# Altium PCB PCB2.PcbDoc (part 2 of 4)
Units mm, origin at the board's own origin, x right, y up, seen from the top; angles counter-clockwise.
Board outline 94 x 91 mm, 2 copper layers (Top Layer, Bottom Layer); 387 components, 398 nets, 1559 pads, 0 vias.
Unrouted connection lines stored in the file: 857.
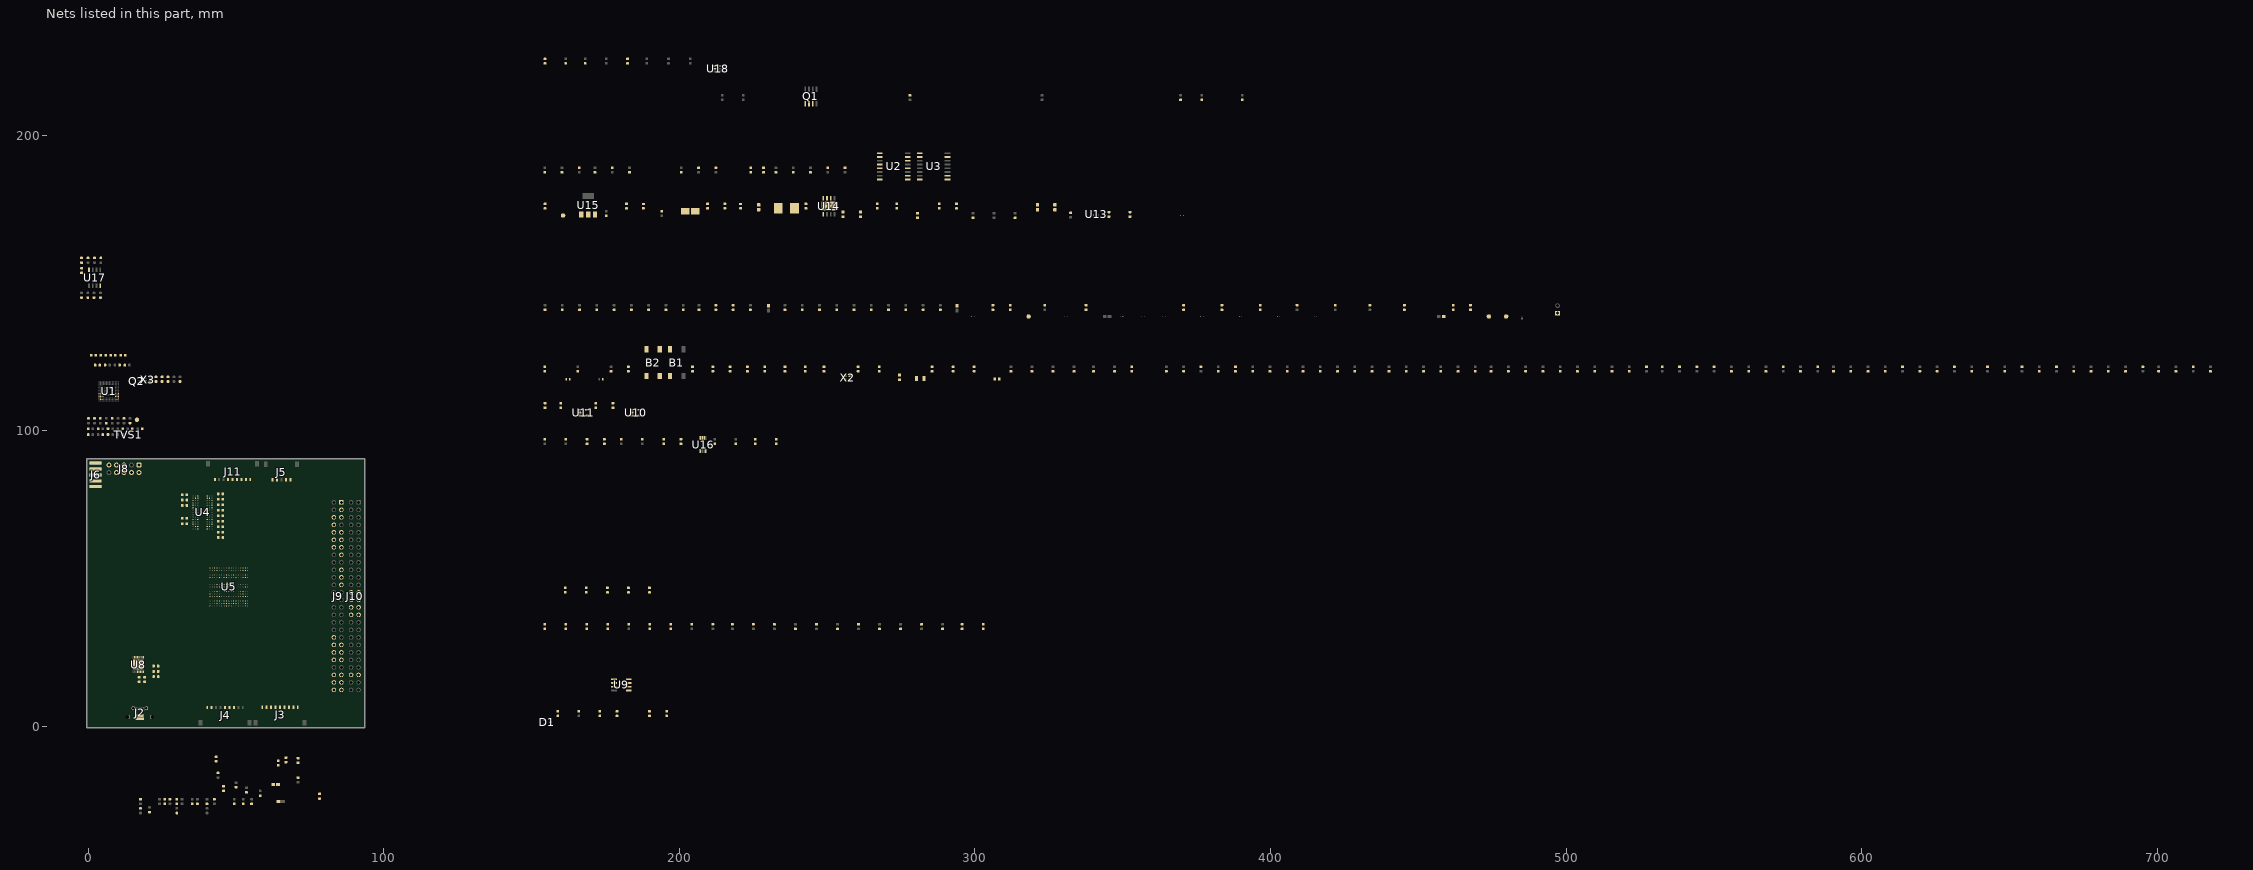
[diagram p2: the nets of this part, all layers, seen from the top]

## Footprints (in the part's own frame and the unit in brackets; to place one, negate y for a bottom-side part, rotate by r counter-clockwise, add the part's x,y. Pads: shape width x height; smd on the part's side, far side on the other; paste and mask are expansions set on the pad) (continued)
IC_TPS25974ARPWR [mm]
  rect 0.1x0.1 smd paste-1 mask+0: 1(-0.725,0.875) 2(-0.9,0.225) 3(-0.9,-0.225) 4(-0.725,-0.875) 5(-0.25,0) 6(0.25,0) 7(0.725,-0.875) 8(0.9,-0.225) 9(0.9,0.225) 10(0.725,0.875)
  Top Layer region: 1.158,-0.101 1.16,-0.101 1.163,-0.102 1.165,-0.102 1.168,-0.103 1.17,-0.104 1.173,-0.105 1.175,-0.107 1.177,-0.108 1.179,-0.11 1.181,-0.111 1.183,-0.113 1.185,-0.115 1.187,-0.117 1.189,-0.119 1.19,-0.121 1.192,-0.123 1.193,-0.125 1.195,-0.127 1.196,-0.13 1.197,-0.132 1.198,-0.135 1.198,-0.137 1.199,-0.14 1.199,-0.142 1.2,-0.145 1.2,-0.147 1.2,-0.15 1.2,-0.3 1.2,-0.303 1.2,-0.305 1.199,-0.308 1.199,-0.31 1.198,-0.313 1.198,-0.315 1.197,-0.318 1.196,-0.32 1.195,-0.323 1.193,-0.325 1.192,-0.327 1.19,-0.329 1.189,-0.331 1.187,-0.333 1.185,-0.335 1.183,-0.337 1.181,-0.339 1.179,-0.34 1.177,-0.342 1.175,-0.343 1.173,-0.345 1.17,-0.346 1.168,-0.347 1.165,-0.348 1.163,-0.348 1.16,-0.349 1.158,-0.349 1.155,-0.35 0.645,-0.35 0.642,-0.349 0.64,-0.349 0.637,-0.348 0.635,-0.348 0.632,-0.347 0.63,-0.346 0.627,-0.345 0.625,-0.343 0.623,-0.342 0.621,-0.34 0.619,-0.339 0.617,-0.337 0.615,-0.335 0.613,-0.333 0.611,-0.331 0.61,-0.329 0.608,-0.327 0.607,-0.325 0.605,-0.323 0.604,-0.32 0.603,-0.318 0.602,-0.315 0.602,-0.313 0.601,-0.31 0.601,-0.308 0.6,-0.305 0.6,-0.303 0.6,-0.3 0.6,-0.15 0.6,-0.147 0.6,-0.145 0.601,-0.142 0.601,-0.14 0.602,-0.137 0.602,-0.135 0.603,-0.132 0.604,-0.13 0.605,-0.127 0.607,-0.125 0.608,-0.123 0.61,-0.121 0.611,-0.119 0.613,-0.117 0.615,-0.115 0.617,-0.113 0.619,-0.111 0.621,-0.11 0.623,-0.108 0.625,-0.107 0.627,-0.105 0.63,-0.104 0.632,-0.103 0.635,-0.102 0.637,-0.102 0.64,-0.101 0.642,-0.101 0.645,-0.1 1.155,-0.1
  Top Layer region: 0.358,1.199 0.36,1.199 0.363,1.198 0.365,1.198 0.368,1.197 0.37,1.196 0.373,1.195 0.375,1.193 0.377,1.192 0.379,1.19 0.381,1.189 0.383,1.187 0.385,1.185 0.387,1.183 0.389,1.181 0.39,1.179 0.392,1.177 0.393,1.175 0.395,1.173 0.396,1.17 0.397,1.168 0.398,1.165 0.398,1.163 0.399,1.16 0.399,1.158 0.4,1.155 0.4,1.153 0.4,1.15 0.4,-1.15 0.4,-1.153 0.4,-1.155 0.399,-1.158 0.399,-1.16 0.398,-1.163 0.398,-1.165 0.397,-1.168 0.396,-1.17 0.395,-1.173 0.393,-1.175 0.392,-1.177 0.39,-1.179 0.389,-1.181 0.387,-1.183 0.385,-1.185 0.383,-1.187 0.381,-1.189 0.379,-1.19 0.377,-1.192 0.375,-1.193 0.373,-1.195 0.37,-1.196 0.368,-1.197 0.365,-1.198 0.363,-1.198 0.36,-1.199 0.358,-1.199 0.355,-1.2 0.145,-1.2 0.142,-1.199 0.14,-1.199 0.137,-1.198 0.135,-1.198 0.132,-1.197 0.13,-1.196 0.127,-1.195 0.125,-1.193 0.123,-1.192 0.121,-1.19 0.119,-1.189 0.117,-1.187 0.115,-1.185 0.113,-1.183 0.111,-1.181 0.11,-1.179 0.108,-1.177 0.107,-1.175 0.105,-1.173 0.104,-1.17 0.103,-1.168 0.102,-1.165 0.102,-1.163 0.101,-1.16 0.101,-1.158 0.1,-1.155 0.1,-1.153 0.1,-1.15 0.1,1.15 0.1,1.153 0.1,1.155 0.101,1.158 0.101,1.16 0.102,1.163 0.102,1.165 0.103,1.168 0.104,1.17 0.105,1.173 0.107,1.175 0.108,1.177 0.11,1.179 0.111,1.181 0.113,1.183 0.115,1.185 0.117,1.187 0.119,1.189 0.121,1.19 0.123,1.192 0.125,1.193 0.127,1.195 0.13,1.196 0.132,1.197 0.135,1.198 0.137,1.198 0.14,1.199 0.142,1.199 0.145,1.2 0.355,1.2
  Top Layer region: -0.142,1.199 -0.14,1.199 -0.137,1.198 -0.135,1.198 -0.132,1.197 -0.13,1.196 -0.127,1.195 -0.125,1.193 -0.123,1.192 -0.121,1.19 -0.119,1.189 -0.117,1.187 -0.115,1.185 -0.113,1.183 -0.111,1.181 -0.11,1.179 -0.108,1.177 -0.107,1.175 -0.105,1.173 -0.104,1.17 -0.103,1.168 -0.102,1.165 -0.102,1.163 -0.101,1.16 -0.101,1.158 -0.1,1.155 -0.1,1.153 -0.1,1.15 -0.1,-1.15 -0.1,-1.153 -0.1,-1.155 -0.101,-1.158 -0.101,-1.16 -0.102,-1.163 -0.102,-1.165 -0.103,-1.168 -0.104,-1.17 -0.105,-1.173 -0.107,-1.175 -0.108,-1.177 -0.11,-1.179 -0.111,-1.181 -0.113,-1.183 -0.115,-1.185 -0.117,-1.187 -0.119,-1.189 -0.121,-1.19 -0.123,-1.192 -0.125,-1.193 -0.127,-1.195 -0.13,-1.196 -0.132,-1.197 -0.135,-1.198 -0.137,-1.198 -0.14,-1.199 -0.142,-1.199 -0.145,-1.2 -0.355,-1.2 -0.358,-1.199 -0.36,-1.199 -0.363,-1.198 -0.365,-1.198 -0.368,-1.197 -0.37,-1.196 -0.373,-1.195 -0.375,-1.193 -0.377,-1.192 -0.379,-1.19 -0.381,-1.189 -0.383,-1.187 -0.385,-1.185 -0.387,-1.183 -0.389,-1.181 -0.39,-1.179 -0.392,-1.177 -0.393,-1.175 -0.395,-1.173 -0.396,-1.17 -0.397,-1.168 -0.398,-1.165 -0.398,-1.163 -0.399,-1.16 -0.399,-1.158 -0.4,-1.155 -0.4,-1.153 -0.4,-1.15 -0.4,1.15 -0.4,1.153 -0.4,1.155 -0.399,1.158 -0.399,1.16 -0.398,1.163 -0.398,1.165 -0.397,1.168 -0.396,1.17 -0.395,1.173 -0.393,1.175 -0.392,1.177 -0.39,1.179 -0.389,1.181 -0.387,1.183 -0.385,1.185 -0.383,1.187 -0.381,1.189 -0.379,1.19 -0.377,1.192 -0.375,1.193 -0.373,1.195 -0.37,1.196 -0.368,1.197 -0.365,1.198 -0.363,1.198 -0.36,1.199 -0.358,1.199 -0.355,1.2 -0.145,1.2
  Top Layer region: -0.642,-0.551 -0.64,-0.551 -0.637,-0.552 -0.635,-0.552 -0.632,-0.553 -0.63,-0.554 -0.627,-0.555 -0.625,-0.557 -0.623,-0.558 -0.621,-0.56 -0.619,-0.561 -0.617,-0.563 -0.615,-0.565 -0.613,-0.567 -0.611,-0.569 -0.61,-0.571 -0.608,-0.573 -0.607,-0.575 -0.605,-0.577 -0.604,-0.58 -0.603,-0.582 -0.602,-0.585 -0.602,-0.587 -0.601,-0.59 -0.601,-0.592 -0.6,-0.595 -0.6,-0.597 -0.6,-0.6 -0.6,-1.15 -0.6,-1.153 -0.6,-1.155 -0.601,-1.158 -0.601,-1.16 -0.602,-1.163 -0.602,-1.165 -0.603,-1.168 -0.604,-1.17 -0.605,-1.173 -0.607,-1.175 -0.608,-1.177 -0.61,-1.179 -0.611,-1.181 -0.613,-1.183 -0.615,-1.185 -0.617,-1.187 -0.619,-1.189 -0.621,-1.19 -0.623,-1.192 -0.625,-1.193 -0.627,-1.195 -0.63,-1.196 -0.632,-1.197 -0.635,-1.198 -0.637,-1.198 -0.64,-1.199 -0.642,-1.199 -0.645,-1.2 -0.805,-1.2 -0.808,-1.199 -0.81,-1.199 -0.813,-1.198 -0.815,-1.198 -0.818,-1.197 -0.82,-1.196 -0.823,-1.195 -0.825,-1.193 -0.827,-1.192 -0.829,-1.19 -0.831,-1.189 -0.833,-1.187 -0.835,-1.185 -0.837,-1.183 -0.839,-1.181 -0.84,-1.179 -0.842,-1.177 -0.843,-1.175 -0.845,-1.173 -0.846,-1.17 -0.847,-1.168 -0.848,-1.165 -0.848,-1.163 -0.849,-1.16 -0.849,-1.158 -0.85,-1.155 -0.85,-1.153 -0.85,-1.15 -0.85,-0.85 -1.155,-0.85 -1.158,-0.849 -1.16,-0.849 -1.163,-0.848 -1.165,-0.848 -1.168,-0.847 -1.17,-0.846 -1.173,-0.845 -1.175,-0.843 -1.177,-0.842 -1.179,-0.84 -1.181,-0.839 -1.183,-0.837 -1.185,-0.835 -1.187,-0.833 -1.189,-0.831 -1.19,-0.829 -1.192,-0.827 -1.193,-0.825 -1.195,-0.823 -1.196,-0.82 -1.197,-0.818 -1.198,-0.815 -1.198,-0.813 -1.199,-0.81 -1.199,-0.808 -1.2,-0.805 -1.2,-0.803 -1.2,-0.8 -1.2,-0.6 -1.2,-0.597 -1.2,-0.595 -1.199,-0.592 -1.199,-0.59 -1.198,-0.587 -1.198,-0.585 -1.197,-0.582 -1.196,-0.58 -1.195,-0.577 -1.193,-0.575 -1.192,-0.573 -1.19,-0.571 -1.189,-0.569 -1.187,-0.567 -1.185,-0.565 -1.183,-0.563 -1.181,-0.561 -1.179,-0.56 -1.177,-0.558 -1.175,-0.557 -1.173,-0.555 -1.17,-0.554 -1.168,-0.553 -1.165,-0.552 -1.163,-0.552 -1.16,-0.551 -1.158,-0.551 -1.155,-0.55 -0.645,-0.55
  Top Layer region: 0.808,1.199 0.81,1.199 0.813,1.198 0.815,1.198 0.818,1.197 0.82,1.196 0.823,1.195 0.825,1.193 0.827,1.192 0.829,1.19 0.831,1.189 0.833,1.187 0.835,1.185 0.837,1.183 0.839,1.181 0.84,1.179 0.842,1.177 0.843,1.175 0.845,1.173 0.846,1.17 0.847,1.168 0.848,1.165 0.848,1.163 0.849,1.16 0.849,1.158 0.85,1.155 0.85,1.153 0.85,1.15 0.85,0.85 1.155,0.85 1.158,0.849 1.16,0.849 1.163,0.848 1.165,0.848 1.168,0.847 1.17,0.846 1.173,0.845 1.175,0.843 1.177,0.842 1.179,0.84 1.181,0.839 1.183,0.837 1.185,0.835 1.187,0.833 1.189,0.831 1.19,0.829 1.192,0.827 1.193,0.825 1.195,0.823 1.196,0.82 1.197,0.818 1.198,0.815 1.198,0.813 1.199,0.81 1.199,0.808 1.2,0.805 1.2,0.803 1.2,0.8 1.2,0.6 1.2,0.597 1.2,0.595 1.199,0.592 1.199,0.59 1.198,0.587 1.198,0.585 1.197,0.582 1.196,0.58 1.195,0.577 1.193,0.575 1.192,0.573 1.19,0.571 1.189,0.569 1.187,0.567 1.185,0.565 1.183,0.563 1.181,0.561 1.179,0.56 1.177,0.558 1.175,0.557 1.173,0.555 1.17,0.554 1.168,0.553 1.165,0.552 1.163,0.552 1.16,0.551 1.158,0.551 1.155,0.55 0.645,0.55 0.642,0.551 0.64,0.551 0.637,0.552 0.635,0.552 0.632,0.553 0.63,0.554 0.627,0.555 0.625,0.557 0.623,0.558 0.621,0.56 0.619,0.561 0.617,0.563 0.615,0.565 0.613,0.567 0.611,0.569 0.61,0.571 0.608,0.573 0.607,0.575 0.605,0.577 0.604,0.58 0.603,0.582 0.602,0.585 0.602,0.587 0.601,0.59 0.601,0.592 0.6,0.595 0.6,0.597 0.6,0.6 0.6,1.15 0.6,1.153 0.6,1.155 0.601,1.158 0.601,1.16 0.602,1.163 0.602,1.165 0.603,1.168 0.604,1.17 0.605,1.173 0.607,1.175 0.608,1.177 0.61,1.179 0.611,1.181 0.613,1.183 0.615,1.185 0.617,1.187 0.619,1.189 0.621,1.19 0.623,1.192 0.625,1.193 0.627,1.195 0.63,1.196 0.632,1.197 0.635,1.198 0.637,1.198 0.64,1.199 0.642,1.199 0.645,1.2 0.805,1.2
  Top Layer region: 1.158,-0.551 1.16,-0.551 1.163,-0.552 1.165,-0.552 1.168,-0.553 1.17,-0.554 1.173,-0.555 1.175,-0.557 1.177,-0.558 1.179,-0.56 1.181,-0.561 1.183,-0.563 1.185,-0.565 1.187,-0.567 1.189,-0.569 1.19,-0.571 1.192,-0.573 1.193,-0.575 1.195,-0.577 1.196,-0.58 1.197,-0.582 1.198,-0.585 1.198,-0.587 1.199,-0.59 1.199,-0.592 1.2,-0.595 1.2,-0.597 1.2,-0.6 1.2,-0.8 1.2,-0.803 1.2,-0.805 1.199,-0.808 1.199,-0.81 1.198,-0.813 1.198,-0.815 1.197,-0.818 1.196,-0.82 1.195,-0.823 1.193,-0.825 1.192,-0.827 1.19,-0.829 1.189,-0.831 1.187,-0.833 1.185,-0.835 1.183,-0.837 1.181,-0.839 1.179,-0.84 1.177,-0.842 1.175,-0.843 1.173,-0.845 1.17,-0.846 1.168,-0.847 1.165,-0.848 1.163,-0.848 1.16,-0.849 1.158,-0.849 1.155,-0.85 0.85,-0.85 0.85,-1.15 0.85,-1.153 0.85,-1.155 0.849,-1.158 0.849,-1.16 0.848,-1.163 0.848,-1.165 0.847,-1.168 0.846,-1.17 0.845,-1.173 0.843,-1.175 0.842,-1.177 0.84,-1.179 0.839,-1.181 0.837,-1.183 0.835,-1.185 0.833,-1.187 0.831,-1.189 0.829,-1.19 0.827,-1.192 0.825,-1.193 0.823,-1.195 0.82,-1.196 0.818,-1.197 0.815,-1.198 0.813,-1.198 0.81,-1.199 0.808,-1.199 0.805,-1.2 0.645,-1.2 0.642,-1.199 0.64,-1.199 0.637,-1.198 0.635,-1.198 0.632,-1.197 0.63,-1.196 0.627,-1.195 0.625,-1.193 0.623,-1.192 0.621,-1.19 0.619,-1.189 0.617,-1.187 0.615,-1.185 0.613,-1.183 0.611,-1.181 0.61,-1.179 0.608,-1.177 0.607,-1.175 0.605,-1.173 0.604,-1.17 0.603,-1.168 0.602,-1.165 0.602,-1.163 0.601,-1.16 0.601,-1.158 0.6,-1.155 0.6,-1.153 0.6,-1.15 0.6,-0.6 0.6,-0.597 0.6,-0.595 0.601,-0.592 0.601,-0.59 0.602,-0.587 0.602,-0.585 0.603,-0.582 0.604,-0.58 0.605,-0.577 0.607,-0.575 0.608,-0.573 0.61,-0.571 0.611,-0.569 0.613,-0.567 0.615,-0.565 0.617,-0.563 0.619,-0.561 0.621,-0.56 0.623,-0.558 0.625,-0.557 0.627,-0.555 0.63,-0.554 0.632,-0.553 0.635,-0.552 0.637,-0.552 0.64,-0.551 0.642,-0.551 0.645,-0.55 1.155,-0.55
  Top Layer region: -0.642,1.199 -0.64,1.199 -0.637,1.198 -0.635,1.198 -0.632,1.197 -0.63,1.196 -0.627,1.195 -0.625,1.193 -0.623,1.192 -0.621,1.19 -0.619,1.189 -0.617,1.187 -0.615,1.185 -0.613,1.183 -0.611,1.181 -0.61,1.179 -0.608,1.177 -0.607,1.175 -0.605,1.173 -0.604,1.17 -0.603,1.168 -0.602,1.165 -0.602,1.163 -0.601,1.16 -0.601,1.158 -0.6,1.155 -0.6,1.153 -0.6,1.15 -0.6,0.6 -0.6,0.597 -0.6,0.595 -0.601,0.592 -0.601,0.59 -0.602,0.587 -0.602,0.585 -0.603,0.582 -0.604,0.58 -0.605,0.577 -0.607,0.575 -0.608,0.573 -0.61,0.571 -0.611,0.569 -0.613,0.567 -0.615,0.565 -0.617,0.563 -0.619,0.561 -0.621,0.56 -0.623,0.558 -0.625,0.557 -0.627,0.555 -0.63,0.554 -0.632,0.553 -0.635,0.552 -0.637,0.552 -0.64,0.551 -0.642,0.551 -0.645,0.55 -1.155,0.55 -1.158,0.551 -1.16,0.551 -1.163,0.552 -1.165,0.552 -1.168,0.553 -1.17,0.554 -1.173,0.555 -1.175,0.557 -1.177,0.558 -1.179,0.56 -1.181,0.561 -1.183,0.563 -1.185,0.565 -1.187,0.567 -1.189,0.569 -1.19,0.571 -1.192,0.573 -1.193,0.575 -1.195,0.577 -1.196,0.58 -1.197,0.582 -1.198,0.585 -1.198,0.587 -1.199,0.59 -1.199,0.592 -1.2,0.595 -1.2,0.597 -1.2,0.6 -1.2,0.8 -1.2,0.803 -1.2,0.805 -1.199,0.808 -1.199,0.81 -1.198,0.813 -1.198,0.815 -1.197,0.818 -1.196,0.82 -1.195,0.823 -1.193,0.825 -1.192,0.827 -1.19,0.829 -1.189,0.831 -1.187,0.833 -1.185,0.835 -1.183,0.837 -1.181,0.839 -1.179,0.84 -1.177,0.842 -1.175,0.843 -1.173,0.845 -1.17,0.846 -1.168,0.847 -1.165,0.848 -1.163,0.848 -1.16,0.849 -1.158,0.849 -1.155,0.85 -0.85,0.85 -0.85,1.15 -0.85,1.153 -0.85,1.155 -0.849,1.158 -0.849,1.16 -0.848,1.163 -0.848,1.165 -0.847,1.168 -0.846,1.17 -0.845,1.173 -0.843,1.175 -0.842,1.177 -0.84,1.179 -0.839,1.181 -0.837,1.183 -0.835,1.185 -0.833,1.187 -0.831,1.189 -0.829,1.19 -0.827,1.192 -0.825,1.193 -0.823,1.195 -0.82,1.196 -0.818,1.197 -0.815,1.198 -0.813,1.198 -0.81,1.199 -0.808,1.199 -0.805,1.2 -0.645,1.2
  Top Layer region: 1.158,0.349 1.16,0.349 1.163,0.348 1.165,0.348 1.168,0.347 1.17,0.346 1.173,0.345 1.175,0.343 1.177,0.342 1.179,0.34 1.181,0.339 1.183,0.337 1.185,0.335 1.187,0.333 1.189,0.331 1.19,0.329 1.192,0.327 1.193,0.325 1.195,0.323 1.196,0.32 1.197,0.318 1.198,0.315 1.198,0.313 1.199,0.31 1.199,0.308 1.2,0.305 1.2,0.303 1.2,0.3 1.2,0.15 1.2,0.147 1.2,0.145 1.199,0.142 1.199,0.14 1.198,0.137 1.198,0.135 1.197,0.132 1.196,0.13 1.195,0.127 1.193,0.125 1.192,0.123 1.19,0.121 1.189,0.119 1.187,0.117 1.185,0.115 1.183,0.113 1.181,0.111 1.179,0.11 1.177,0.108 1.175,0.107 1.173,0.105 1.17,0.104 1.168,0.103 1.165,0.102 1.163,0.102 1.16,0.101 1.158,0.101 1.155,0.1 0.645,0.1 0.642,0.101 0.64,0.101 0.637,0.102 0.635,0.102 0.632,0.103 0.63,0.104 0.627,0.105 0.625,0.107 0.623,0.108 0.621,0.11 0.619,0.111 0.617,0.113 0.615,0.115 0.613,0.117 0.611,0.119 0.61,0.121 0.608,0.123 0.607,0.125 0.605,0.127 0.604,0.13 0.603,0.132 0.602,0.135 0.602,0.137 0.601,0.14 0.601,0.142 0.6,0.145 0.6,0.147 0.6,0.15 0.6,0.3 0.6,0.303 0.6,0.305 0.601,0.308 0.601,0.31 0.602,0.313 0.602,0.315 0.603,0.318 0.604,0.32 0.605,0.323 0.607,0.325 0.608,0.327 0.61,0.329 0.611,0.331 0.613,0.333 0.615,0.335 0.617,0.337 0.619,0.339 0.621,0.34 0.623,0.342 0.625,0.343 0.627,0.345 0.63,0.346 0.632,0.347 0.635,0.348 0.637,0.348 0.64,0.349 0.642,0.349 0.645,0.35 1.155,0.35
  Top Layer region: -0.642,-0.101 -0.64,-0.101 -0.637,-0.102 -0.635,-0.102 -0.632,-0.103 -0.63,-0.104 -0.627,-0.105 -0.625,-0.107 -0.623,-0.108 -0.621,-0.11 -0.619,-0.111 -0.617,-0.113 -0.615,-0.115 -0.613,-0.117 -0.611,-0.119 -0.61,-0.121 -0.608,-0.123 -0.607,-0.125 -0.605,-0.127 -0.604,-0.13 -0.603,-0.132 -0.602,-0.135 -0.602,-0.137 -0.601,-0.14 -0.601,-0.142 -0.6,-0.145 -0.6,-0.147 -0.6,-0.15 -0.6,-0.3 -0.6,-0.303 -0.6,-0.305 -0.601,-0.308 -0.601,-0.31 -0.602,-0.313 -0.602,-0.315 -0.603,-0.318 -0.604,-0.32 -0.605,-0.323 -0.607,-0.325 -0.608,-0.327 -0.61,-0.329 -0.611,-0.331 -0.613,-0.333 -0.615,-0.335 -0.617,-0.337 -0.619,-0.339 -0.621,-0.34 -0.623,-0.342 -0.625,-0.343 -0.627,-0.345 -0.63,-0.346 -0.632,-0.347 -0.635,-0.348 -0.637,-0.348 -0.64,-0.349 -0.642,-0.349 -0.645,-0.35 -1.155,-0.35 -1.158,-0.349 -1.16,-0.349 -1.163,-0.348 -1.165,-0.348 -1.168,-0.347 -1.17,-0.346 -1.173,-0.345 -1.175,-0.343 -1.177,-0.342 -1.179,-0.34 -1.181,-0.339 -1.183,-0.337 -1.185,-0.335 -1.187,-0.333 -1.189,-0.331 -1.19,-0.329 -1.192,-0.327 -1.193,-0.325 -1.195,-0.323 -1.196,-0.32 -1.197,-0.318 -1.198,-0.315 -1.198,-0.313 -1.199,-0.31 -1.199,-0.308 -1.2,-0.305 -1.2,-0.303 -1.2,-0.3 -1.2,-0.15 -1.2,-0.147 -1.2,-0.145 -1.199,-0.142 -1.199,-0.14 -1.198,-0.137 -1.198,-0.135 -1.197,-0.132 -1.196,-0.13 -1.195,-0.127 -1.193,-0.125 -1.192,-0.123 -1.19,-0.121 -1.189,-0.119 -1.187,-0.117 -1.185,-0.115 -1.183,-0.113 -1.181,-0.111 -1.179,-0.11 -1.177,-0.108 -1.175,-0.107 -1.173,-0.105 -1.17,-0.104 -1.168,-0.103 -1.165,-0.102 -1.163,-0.102 -1.16,-0.101 -1.158,-0.101 -1.155,-0.1 -0.645,-0.1
  Top Layer region: -0.642,0.349 -0.64,0.349 -0.637,0.348 -0.635,0.348 -0.632,0.347 -0.63,0.346 -0.627,0.345 -0.625,0.343 -0.623,0.342 -0.621,0.34 -0.619,0.339 -0.617,0.337 -0.615,0.335 -0.613,0.333 -0.611,0.331 -0.61,0.329 -0.608,0.327 -0.607,0.325 -0.605,0.323 -0.604,0.32 -0.603,0.318 -0.602,0.315 -0.602,0.313 -0.601,0.31 -0.601,0.308 -0.6,0.305 -0.6,0.303 -0.6,0.3 -0.6,0.15 -0.6,0.147 -0.6,0.145 -0.601,0.142 -0.601,0.14 -0.602,0.137 -0.602,0.135 -0.603,0.132 -0.604,0.13 -0.605,0.127 -0.607,0.125 -0.608,0.123 -0.61,0.121 -0.611,0.119 -0.613,0.117 -0.615,0.115 -0.617,0.113 -0.619,0.111 -0.621,0.11 -0.623,0.108 -0.625,0.107 -0.627,0.105 -0.63,0.104 -0.632,0.103 -0.635,0.102 -0.637,0.102 -0.64,0.101 -0.642,0.101 -0.645,0.1 -1.155,0.1 -1.158,0.101 -1.16,0.101 -1.163,0.102 -1.165,0.102 -1.168,0.103 -1.17,0.104 -1.173,0.105 -1.175,0.107 -1.177,0.108 -1.179,0.11 -1.181,0.111 -1.183,0.113 -1.185,0.115 -1.187,0.117 -1.189,0.119 -1.19,0.121 -1.192,0.123 -1.193,0.125 -1.195,0.127 -1.196,0.13 -1.197,0.132 -1.198,0.135 -1.198,0.137 -1.199,0.14 -1.199,0.142 -1.2,0.145 -1.2,0.147 -1.2,0.15 -1.2,0.3 -1.2,0.303 -1.2,0.305 -1.199,0.308 -1.199,0.31 -1.198,0.313 -1.198,0.315 -1.197,0.318 -1.196,0.32 -1.195,0.323 -1.193,0.325 -1.192,0.327 -1.19,0.329 -1.189,0.331 -1.187,0.333 -1.185,0.335 -1.183,0.337 -1.181,0.339 -1.179,0.34 -1.177,0.342 -1.175,0.343 -1.173,0.345 -1.17,0.346 -1.168,0.347 -1.165,0.348 -1.163,0.348 -1.16,0.349 -1.158,0.349 -1.155,0.35 -0.645,0.35
  silkscreen extent -2,-1.3 1.3,1.3, body extent -1,-1 1,1, height 1
JCET-SMB-2_M [mm] "Molded Diode, 2-Leads, Body 4.57x3.94mm"
  rect 2.85x2.25 smd: 1(-1.675,0) 2(1.675,0)
  silkscreen extent -2.3,-2 3.6,2, body extent -2.5,-1.97 2.5,1.97, height 2.44
Jump2 [mil]
  round 1 smd: 1(0,17.33) 2(0,-17.33)
  Top Layer region: 29.08,-5.13 23.68,-17.63 13.25,-26.39 0,-29.53 -13.25,-26.39 -23.68,-17.63 -29.08,-5.13 -29.08,-5.13
  Top Layer region: -29.08,5.13 -23.68,17.63 -13.25,26.39 0,29.53 13.25,26.39 23.68,17.63 29.08,5.13 29.08,5.13
  silkscreen extent -39,-39 39,39
LED-0603-GREEN [mm]
  rect 0.9x1 smd: 1(-0.8,0) 2(0.8,0)
  silkscreen extent -1.27,-0.58 1.27,0.58, body extent -0.81,-0.5 0.81,0.5, height 0.98
LED-0603-RED [mm]
  rect 0.9x1 smd: 1(-0.8,0) 2(0.8,0)
  silkscreen extent -1.27,-0.58 1.27,0.58, body extent -0.81,-0.5 0.81,0.5, height 0.98
MODULE_FPGA [mm]
  Keep-Out Layer region: -8.382,-8.382 -8.382,8.382 25.4,8.382 25.4,-8.382
  silkscreen extent -8.38,-8.38 25.4,8.38
NZ2520SH-24M [mm]
  rect 0.95x0.85 smd: 1(-0.815,0.625) 2(-0.815,-0.625) 3(0.835,-0.625) 4(0.835,0.625)
  silkscreen extent -1.35,1.4 -1.25,1.5, body extent -1.3,-1.05 1.3,1.05, height 0.9
ONSC-SOT-23-3-318-08_V [mm] "SOT23, 3-Leads, Body 2.92x1.3mm, Pitch 0.95mm"
  rect 0.9x0.8 smd: 1(-1,0.95) 2(-1,-0.95) 3(1,0)
  silkscreen extent -1.12,-1.46 0.65,2.02, body extent -0.65,-1.46 0.65,1.46, height 1.11
QFN32_5X5MC_MCH [mil]
  rect 32x10 smd paste+0 mask+0: 1(-96.5,70) 2(-96.5,50) 3(-96.5,30) 4(-96.5,10) 5(-96.5,-10) 6(-96.5,-30) 7(-96.5,-50) 8(-96.5,-70) 17(96.5,-70) 18(96.5,-50) 19(96.5,-30) 20(96.5,-10) 21(96.5,10) 22(96.5,30) 23(96.5,50) 24(96.5,70)
  rect 10x32 smd paste+0 mask+0: 9(-70,-96.5) 10(-50,-96.5) 11(-30,-96.5) 12(-10,-96.5) 13(10,-96.5) 14(30,-96.5) 15(50,-96.5) 16(70,-96.5) 25(70,96.5) 26(50,96.5) 27(30,96.5) 28(10,96.5) 29(-10,96.5) 30(-30,96.5) 31(-50,96.5) 32(-70,96.5)
  rect 134x134 smd paste-66.5 mask-66.5: 33(0,0)
  silkscreen extent -103,-132 132,132, body extent -101,-101 101,101, height 65
RES_C_1608X60 [mm] "Chip Resistor, 2-Leads, Body 1.63x0.83mm, IPC High Density"
  rrect50% 0.85x0.95 smd: 1(-0.775,0) 2(0.775,0)
  silkscreen extent -0.9,-0.7 0.9,0.7, body extent -0.87,-0.48 0.87,0.48, height 0.6
SOIC8_150MIL_N_ISI [mil]
  rect 57.5x22 smd paste+0 mask+0: 1(-107.25,75) 2(-107.25,25) 3(-107.25,-25) 4(-107.25,-75) 5(107.25,-75) 6(107.25,-25) 7(107.25,25) 8(107.25,75)
  silkscreen extent -84,-104 84,104, body extent -122,-99 122,99, height 69
"SOIC127P599X175-8N - duplicate" [mm]
  rrect25% 1.97x0.6 smd: 1(-2.47,1.905) 2(-2.47,0.635) 3(-2.47,-0.635) 4(-2.47,-1.905) 5(2.47,-1.905) 6(2.47,-0.635) 7(2.47,0.635) 8(2.47,1.905)
  silkscreen extent -4.14,-2.52 1.95,2.52, body extent -3,-2.45 3,2.45, height 1.75
SOIC127P600X175-8N [mm]
  rrect25% 1.97x0.6 smd: 1(-2.475,1.905) 2(-2.475,0.635) 3(-2.475,-0.635) 4(-2.475,-1.905) 5(2.475,-1.905) 6(2.475,-0.635) 7(2.475,0.635) 8(2.475,1.905)
  silkscreen extent -4.54,-2.52 1.95,2.52, body extent -3,-2.45 3,2.45, height 1.75
SOP2-16_7P5X10P3_MRN [mil]
  rect 76x22 smd paste+0 mask+0: 1(-185.5,175) 2(-185.5,125) 3(-185.5,75) 4(-185.5,25) 5(-185.5,-25) 6(-185.5,-75) 7(-185.5,-125) 8(-185.5,-175) 9(185.5,-175) 10(185.5,-125) 11(185.5,-75) 12(185.5,-25) 13(185.5,25) 14(185.5,75) 15(185.5,125) 16(185.5,175)
  silkscreen extent -152,-208 244,208, body extent -209,-203 209,203, height 108
SOT230P700X180-4N [mm]
  rect 1.5x2 smd: 1(-2.3,-3.15) 2(0,-3.15) 3(2.3,-3.15)
  rect 3.8x2 smd: 4(0,3.15)
  silkscreen extent -3.6,-3.7 3.35,1.85, body extent -3.25,-3.5 3.25,3.5, height 1.8
SRP7050TA-220M [mm]
  rect 2.95x3.5 smd: 1(-2.725,0) 2(2.725,0)
  silkscreen extent -4.4,-3.3 4.4,3.3, body extent -3.65,-3.3 3.65,3.3, height 4.6
TESTPOINT [mm]
  round 1.5 smd: 1(0,0)
  silkscreen extent -1,-1 1,1
TFBGA240+25 [mil]
  round 9 smd paste+0 mask+3: A1(-251.97,251.97) A2(-220.47,251.97) A3(-188.98,251.97) A4(-157.48,251.97) A5(-125.98,251.97) A6(-94.49,251.97) A7(-62.99,251.97) A8(-31.5,251.97) A9(0,251.97) A10(31.5,251.97) A11(62.99,251.97) A12(94.49,251.97) A13(125.98,251.97) A14(157.48,251.97) A15(188.98,251.97) A16(220.47,251.97) A17(251.97,251.97) B1(-251.97,220.47) B2(-220.47,220.47) B3(-188.98,220.47) B4(-157.48,220.47) B5(-125.98,220.47) B6(-94.49,220.47) B7(-62.99,220.47) B8(-31.5,220.47) B9(0,220.47) B10(31.5,220.47) B11(62.99,220.47) B12(94.49,220.47) B13(125.98,220.47) B14(157.48,220.47) B15(188.98,220.47) B16(220.47,220.47) B17(251.97,220.47) C1(-251.97,188.98) C2(-220.47,188.98) C3(-188.98,188.98) C4(-157.48,188.98) C5(-125.98,188.98) C6(-94.49,188.98) C7(-62.99,188.98) C8(-31.5,188.98) C9(0,188.98) C10(31.5,188.98) C11(62.99,188.98) C12(94.49,188.98) C13(125.98,188.98) C14(157.48,188.98) C15(188.98,188.98) C16(220.47,188.98) C17(251.97,188.98) D1(-251.97,157.48) D2(-220.47,157.48) D3(-188.98,157.48) D4(-157.48,157.48) D5(-125.98,157.48) D6(-94.49,157.48) D7(-62.99,157.48) D8(-31.5,157.48) D9(0,157.48) D10(31.5,157.48) D11(62.99,157.48) D12(94.49,157.48) D13(125.98,157.48) D14(157.48,157.48) D15(188.98,157.48) D16(220.47,157.48) D17(251.97,157.48) E1(-251.97,125.98) E2(-220.47,125.98) E3(-188.98,125.98) E4(-157.48,125.98) E5(-125.98,125.98) E6(-94.49,125.98) E7(-62.99,125.98) E8(-31.5,125.98) E9(0,125.98) E10(31.5,125.98) E11(62.99,125.98) E12(94.49,125.98) E13(125.98,125.98) E14(157.48,125.98) E15(188.98,125.98) E16(220.47,125.98) E17(251.97,125.98) F1(-251.97,94.49) F2(-220.47,94.49) F3(-188.98,94.49) F4(-157.48,94.49) F5(-125.98,94.49) F13(125.98,94.49) F14(157.48,94.49) F15(188.98,94.49) F16(220.47,94.49) F17(251.97,94.49) G1(-251.97,62.99) G2(-220.47,62.99) G3(-188.98,62.99) G4(-157.48,62.99) G5(-125.98,62.99) G7(-62.99,62.99) G8(-31.5,62.99) G9(0,62.99) G10(31.5,62.99) G11(62.99,62.99) G13(125.98,62.99) G14(157.48,62.99) G15(188.98,62.99) G16(220.47,62.99) G17(251.97,62.99) H1(-251.97,31.5) H2(-220.47,31.5) H3(-188.98,31.5) H4(-157.48,31.5) H5(-125.98,31.5) H7(-62.99,31.5) H8(-31.5,31.5) H9(0,31.5) H10(31.5,31.5) H11(62.99,31.5) H13(125.98,31.5) H14(157.48,31.5) H15(188.98,31.5) H16(220.47,31.5) H17(251.97,31.5) J1(-251.97,0) J2(-220.47,0) J3(-188.98,0) J4(-157.48,0) J5(-125.98,0) J7(-62.99,0) J8(-31.5,0) J9(0,0) J10(31.5,0) J11(62.99,0) J13(125.98,0) J14(157.48,0) J15(188.98,0) J16(220.47,0) J17(251.97,0) K1(-251.97,-31.5) K2(-220.47,-31.5) K3(-188.98,-31.5) K4(-157.48,-31.5) K5(-125.98,-31.5) K7(-62.99,-31.5) K8(-31.5,-31.5) K9(0,-31.5) K10(31.5,-31.5) K11(62.99,-31.5) K13(125.98,-31.5) K14(157.48,-31.5) K15(188.98,-31.5) K16(220.47,-31.5) K17(251.97,-31.5) L1(-251.97,-62.99) L2(-220.47,-62.99) L3(-188.98,-62.99) L4(-157.48,-62.99) L5(-125.98,-62.99) L7(-62.99,-62.99) L8(-31.5,-62.99) L9(0,-62.99) L10(31.5,-62.99) L11(62.99,-62.99) L13(125.98,-62.99) L14(157.48,-62.99) L15(188.98,-62.99) L16(220.47,-62.99) L17(251.97,-62.99) M1(-251.97,-94.49) M2(-220.47,-94.49) M3(-188.98,-94.49) M4(-157.48,-94.49) M5(-125.98,-94.49) M13(125.98,-94.49) M14(157.48,-94.49) M15(188.98,-94.49) M16(220.47,-94.49) M17(251.97,-94.49) N1(-251.97,-125.98) N2(-220.47,-125.98) N3(-188.98,-125.98) N4(-157.48,-125.98) N5(-125.98,-125.98) N6(-94.49,-125.98) N7(-62.99,-125.98) N8(-31.5,-125.98) N9(0,-125.98) N10(31.5,-125.98) N11(62.99,-125.98) N12(94.49,-125.98) N13(125.98,-125.98) N14(157.48,-125.98) N15(188.98,-125.98) N16(220.47,-125.98) N17(251.97,-125.98) P1(-251.97,-157.48) P2(-220.47,-157.48) P3(-188.98,-157.48) P4(-157.48,-157.48) P5(-125.98,-157.48) P6(-94.49,-157.48) P7(-62.99,-157.48) P8(-31.5,-157.48) P9(0,-157.48) P10(31.5,-157.48) P11(62.99,-157.48) P12(94.49,-157.48) P13(125.98,-157.48) P14(157.48,-157.48) P15(188.98,-157.48) P16(220.47,-157.48) P17(251.97,-157.48) R1(-251.97,-188.98) R2(-220.47,-188.98) R3(-188.98,-188.98) R4(-157.48,-188.98) R5(-125.98,-188.98) R6(-94.49,-188.98) R7(-62.99,-188.98) R8(-31.5,-188.98) R9(0,-188.98) R10(31.5,-188.98) R11(62.99,-188.98) R12(94.49,-188.98) R13(125.98,-188.98) R14(157.48,-188.98) R15(188.98,-188.98) R16(220.47,-188.98) R17(251.97,-188.98) T1(-251.97,-220.47) T2(-220.47,-220.47) T3(-188.98,-220.47) T4(-157.48,-220.47) T5(-125.98,-220.47) T6(-94.49,-220.47) T7(-62.99,-220.47) T8(-31.5,-220.47) T9(0,-220.47) T10(31.5,-220.47) T11(62.99,-220.47) T12(94.49,-220.47) T13(125.98,-220.47) T14(157.48,-220.47) T15(188.98,-220.47) T16(220.47,-220.47) T17(251.97,-220.47) U1(-251.97,-251.97) U2(-220.47,-251.97) U3(-188.98,-251.97) U4(-157.48,-251.97) U5(-125.98,-251.97) U6(-94.49,-251.97) U7(-62.99,-251.97) U8(-31.5,-251.97) U9(0,-251.97) U10(31.5,-251.97) U11(62.99,-251.97) U12(94.49,-251.97) U13(125.98,-251.97) U14(157.48,-251.97) U15(188.98,-251.97) U16(220.47,-251.97) U17(251.97,-251.97)
  Keep-Out Layer region: -285.22,-285.22 -285.22,285.22 285.22,285.22 285.22,-285.22
  silkscreen extent -288,-288 288,288, body extent -279,-279 279,279, height 43
TFBGA-90_8X13_ISI [mil]
  round 16 smd paste+0 mask+0: A1(-125.98,220.47) A2(-94.49,220.47) A3(-62.99,220.47) A7(62.99,220.47) A8(94.49,220.47) A9(125.98,220.47) B1(-125.98,188.98) B2(-94.49,188.98) B3(-62.99,188.98) B7(62.99,188.98) B8(94.49,188.98) B9(125.98,188.98) C1(-125.98,157.48) C2(-94.49,157.48) C3(-62.99,157.48) C7(62.99,157.48) C8(94.49,157.48) C9(125.98,157.48) D1(-125.98,125.98) D2(-94.49,125.98) D3(-62.99,125.98) D7(62.99,125.98) D8(94.49,125.98) D9(125.98,125.98) E1(-125.98,94.49) E2(-94.49,94.49) E3(-62.99,94.49) E7(62.99,94.49) E8(94.49,94.49) E9(125.98,94.49) F1(-125.98,62.99) F2(-94.49,62.99) F3(-62.99,62.99) F7(62.99,62.99) F8(94.49,62.99) F9(125.98,62.99) G1(-125.98,31.5) G2(-94.49,31.5) G3(-62.99,31.5) G7(62.99,31.5) G8(94.49,31.5) G9(125.98,31.5) H1(-125.98,0) H2(-94.49,0) H3(-62.99,0) H7(62.99,0) H8(94.49,0) H9(125.98,0) J1(-125.98,-31.5) J2(-94.49,-31.5) J3(-62.99,-31.5) J7(62.99,-31.5) J8(94.49,-31.5) J9(125.98,-31.5) K1(-125.98,-62.99) K2(-94.49,-62.99) K3(-62.99,-62.99) K7(62.99,-62.99) K8(94.49,-62.99) K9(125.98,-62.99) L1(-125.98,-94.49) L2(-94.49,-94.49) L3(-62.99,-94.49) L7(62.99,-94.49) L8(94.49,-94.49) L9(125.98,-94.49) M1(-125.98,-125.98) M2(-94.49,-125.98) M3(-62.99,-125.98) M7(62.99,-125.98) M8(94.49,-125.98) M9(125.98,-125.98) N1(-125.98,-157.48) N2(-94.49,-157.48) N3(-62.99,-157.48) N7(62.99,-157.48) N8(94.49,-157.48) N9(125.98,-157.48) P1(-125.98,-188.98) P2(-94.49,-188.98) P3(-62.99,-188.98) P7(62.99,-188.98) P8(94.49,-188.98) P9(125.98,-188.98) R1(-125.98,-220.47) R2(-94.49,-220.47) R3(-62.99,-220.47) R7(62.99,-220.47) R8(94.49,-220.47) R9(125.98,-220.47)
  Keep-Out Layer region: -159.23,-253.72 -159.23,253.72 159.23,253.72 159.23,-253.72
  silkscreen extent -170,-268 170,268, body extent -159,-258 159,258, height 47
TPL5010DDCR [mm]
  rrect25% 1.45x0.59 smd: 1(-1.155,0.95) 2(-1.155,0) 3(-1.155,-0.95) 4(1.155,-0.95) 5(1.155,0) 6(1.155,0.95)
  silkscreen extent -2.5,-1.57 0.8,1.57, body extent -1.4,-1.45 1.4,1.45, height 1.1
TSSOP8_SOT505-1_NXP [mil]
  rect 53.5x20 smd paste+0 mask+0: 1(-87.75,38.39) 2(-87.75,12.8) 3(-87.75,-12.8) 4(-87.75,-38.39) 5(87.75,-38.39) 6(87.75,-12.8) 7(87.75,12.8) 8(87.75,38.39)
  silkscreen extent -66,-66 66,66, body extent -101,-61 101,61, height 43
TVS_ESDA7P60-1U1M [mm]
  rect 0.55x0.8 smd: 1(-0.625,0) 2(0.625,0)
  silkscreen extent -1.6,-0.5 0.03,0.5

## Part data
B1 B2: library part CMP-03407-000003-1, "SWITCH TACTILE SPST-NO 0.05A 24V", Contact Current Rating=50mA, Contact Resistance=100mΩ, Manufacturer="TE Connectivity", Operating Force=160gf, Package=0, Temperature="-35°C to +85°C", Temperature Range High=+85°C, Temperature Range Low=-35°C, Voltage Rating Dc=24V, Automotive=No, Category=Switch, Ciiva Ids=2672442, ComponentLink2Description=Datasheet, ComponentLink2URL=https://www.te.com/commerce/DocumentDelivery/DDEController?Action=showdoc&DocId=Customer+Drawing%7F2-1437565-7%7FV%7Fpdf%7FEnglish%7FENG_CD_2-1437565-7_V.pdf%7F4-1437565-1, Device Class L1=Electromechanical, Device Class L2=Switches, Device Class L3="Tactile Switches", Digikey Description="SWITCH TACTILE SPST-NO 0.05A 24V", Electromechanical Life=100000Cycles, Height=5.38mm, Import Ts=1521848451, Lead Free=Yes, Manufacturer Part Number=4-1437565-1, Mount="Surface Mount", Mouser Description="Switch Tactile OFF (ON) SPST Round Button Gull Wing 0.05A 12VDC 1.57N SMD Loose Piece", Octopart=https://octopart.com/fsm4jsma-te+connectivity-55488004, Release Date=1503379960, RoHS=TRUE, Standoff Height=0.05mm, Throw Configuration=SPST-NO
C1 C3 C5 C7 C8 C9 C10 C11 C12 C13 C14 C15 C16 C17 C18 C19 C20 C21 C22 C40 C42 C43 C44 C45 C46 C47 C48 C49 C50 C51 C53 C54 C55 C56 C57 C58 C59 C60 C61 C62 C64 C65 C66 C67 C69 C70 C71 C72 C73 C74 C75 C76 C77: library part MCD-00006, "Capacitor, MLCC, 100nF, 16V, X7R, +/-10%, 0603, T=0.5mm", Manufacturer=YAGEO, Manufacturer_Part_Number=CC0402KRX7R7BB104, Package=0402, Component_Country_Of_Origin=China, ComponentLink1URL=http://tunmcdsvn.tun.st.com/Component_Documentation_Library/Trunk/Capacitor/YAGEO_X7R_Series, ID=2474, Internal_Part_Number=MCD-00006, Order_Code_Digikey=311-1338-1-ND, Order_Code_Farnell=9402047, Order_Code_RS=9402047, Part_Preference=Recommended, Part_Type=Capacitor, Partial_Alternate_Internal_Part_Number=MCD-03299, ShowFields=YES, Status=Released
C2 C4 C6 C35 C36 C37 C39 C68: library part MCD-00012, "Capacitor, MLCC, 2.2uF, 10V, X5R, 10%, 0603, T=0,8mm", Alternate_Manufacturer=KEMET, Alternate_Manufacturer_Part_Number=C0603C225K8PACTU, Manufacturer=YAGEO, Manufacturer_Part_Number=CC0603KRX5R6BB225, Package=0603, BMS_Part_Number=9142010, Component_Country_Of_Origin=China, ComponentLink1Description=Yageo_Capacitor_X5R-series.pdf, ComponentLink1URL=http://tunmcdsvn.tun.st.com/Component_Documentation_Library/Trunk/Capacitor/YAGEO_X5R_Series, ECCN_EU=n/a, ECCN_US=n/a, ID=2467, Initial_Board_Reference=MB1274, Internal_Part_Number=MCD-00012, Order_Code_Digikey=311-1451-1-ND, Order_Code_Farnell=2370679, Order_Code_RS=2370679, Part_Preference=Recommended, Part_Type=Capacitor, Partial_Alternate_Internal_Part_Number=MCD-00551, Provided_By=Subcon, ShowFields=YES, Status=Released
C23: library part MCD-00563, "Capacitor, MLCC, 10nF, 60V, NPO, +-0.25pF, 0603, T=0,5mm", Manufacturer=YAGEO, Manufacturer_Part_Number=CC0402CRNPO9BN1R5, Package=0402, Component_Country_Of_Origin=China, ComponentLink1Description=Yageo_Capacitor_NP0_16V-to-50V.pdf, ComponentLink1URL=http://tunmcdsvn.tun.st.com/Component_Documentation_Library/Trunk/Capacitor/YAGEO_NP0_Series, ECCN_EU=n/a, ECCN_US=n/a, ID=3175, Initial_Board_Reference=MB1331, Internal_Part_Number=MCD-00563, Order_Code_Digikey=311-1003-1-ND, Order_Code_Farnell=3019111, Order_Code_RS=N/A, Part_Preference=Recommended, Part_Type=Capacitor, Partial_Alternate_Internal_Part_Number=MCD-01460, Provided_By=Subcon, ShowFields=YES, Status=Released
C24 C25 C27: library part MCD-00563, "Capacitor, MLCC, 1.5pF, 50V, NPO, +-0.25pF, 0603, T=0,5mm", Manufacturer=YAGEO, Manufacturer_Part_Number=CC0402CRNPO9BN1R5, Package=0402, Component_Country_Of_Origin=China, ComponentLink1Description=Yageo_Capacitor_NP0_16V-to-50V.pdf, ComponentLink1URL=http://tunmcdsvn.tun.st.com/Component_Documentation_Library/Trunk/Capacitor/YAGEO_NP0_Series, ECCN_EU=n/a, ECCN_US=n/a, ID=3175, Initial_Board_Reference=MB1331, Internal_Part_Number=MCD-00563, Order_Code_Digikey=311-1003-1-ND, Order_Code_Farnell=3019111, Order_Code_RS=N/A, Part_Preference=Recommended, Part_Type=Capacitor, Partial_Alternate_Internal_Part_Number=MCD-01460, Provided_By=Subcon, ShowFields=YES, Status=Released
C26 C28: library part MCD-00006, "Capacitor, MLCC, 100nF, 16V, NPO, +-0.25pF, 0603, T=0,5mm", Manufacturer=YAGEO, Manufacturer_Part_Number=CC0402KRX7R7BB104, Package=0402, Component_Country_Of_Origin=China, ComponentLink1URL=http://tunmcdsvn.tun.st.com/Component_Documentation_Library/Trunk/Capacitor/YAGEO_X7R_Series, ID=2474, Internal_Part_Number=MCD-00006, Order_Code_Digikey=311-1338-1-ND, Order_Code_Farnell=9402047, Order_Code_RS=9402047, Part_Preference=Recommended, Part_Type=Capacitor, Partial_Alternate_Internal_Part_Number=MCD-03299, ShowFields=YES, Status=Released
C29: library part MCD-01355, "Capacitor, MLCC, 10uF, 6V3, X7R, +/-10%, 0603, T=0.5mm", Manufacturer=MURATA, Manufacturer_Part_Number=GRM155R60G106ME44, Package=0402, Component_Country_Of_Origin=Japan°°, ComponentLink1Description=Datasheet, ComponentLink1URL=http://tunmcdsvn.tun.st.com/Component_Documentation_Library/Trunk/Capacitor/MURATA_GRM_Series, ID=3455, Initial_Board_Reference=MB1372, Internal_Part_Number=MCD-01355, Order_Code_Digikey=490-10693-1-ND, Order_Code_Farnell=2611904, Order_Code_RS=172-6477, Part_Preference=Recommended, Part_Type=Capacitor, Partial_Alternate_Internal_Part_Number="MCD-01716, MCD-02999", Provided_By=Subcon, ShowFields=YES, Status=Released
C30: library part MCD-01225, "Capacitor, MLCC, 220pF, 16V, X7R, +/-10%, 0603, T=0.5mm", Manufacturer=YAGEO, Manufacturer_Part_Number=CC0402JRNPO9BN221, Package=0402, Component_Country_Of_Origin=China, ComponentLink1Description=Datasheet, ComponentLink1URL=http://tunmcdsvn.tun.st.com/Component_Documentation_Library/Trunk/Capacitor/YAGEO_NP0_Series, ID=3272, Initial_Board_Reference=MB1331, Internal_Part_Number=MCD-01225, Order_Code_Digikey=311-1416-1-ND, Order_Code_Farnell=3019240, Order_Code_RS=616-9284, Part_Preference=Recommended, Part_Type=Capacitor, Provided_By=Subcon, ShowFields=YES, Status=Released
C31: library part MCD-01341, "Capacitor, MLCC, 10uF, 6V3, X5R, 20%, 0603, T=0,8mm", Manufacturer=MURATA, Manufacturer_Part_Number=GRM188R60J106ME47D, Package=0603, Component_Country_Of_Origin=Japan°°, ComponentLink1Description=Datasheet, ComponentLink1URL=http://tunmcdsvn.tun.st.com/Component_Documentation_Library/Trunk/Capacitor/MURATA_GRM_Series, ID=3441, Initial_Board_Reference=MB1331, Internal_Part_Number=MCD-01341, Order_Code_Digikey=490-3896-1-ND, Order_Code_Farnell=1735528, Order_Code_RS=N/A, Part_Preference=Recommended, Part_Type=Capacitor, Provided_By=Subcon, ShowFields=YES, Status=Released
C32 C33 C34: library part MCD-01356, "Capacitor, MLCC, 100nF, 16V, X7R, +/-10%, 0603, T=0.5mm", Manufacturer=MURATA, Manufacturer_Part_Number=GRM155R60J475ME47, Package=0402, Component_Country_Of_Origin=Japan°°, ComponentLink1Description=Datasheet, ComponentLink1URL=http://tunmcdsvn.tun.st.com/Component_Documentation_Library/Trunk/Capacitor/MURATA_GRM_Series, ID=3456, Initial_Board_Reference=MB1372, Internal_Part_Number=MCD-01356, Order_Code_Digikey=490-5915-1-ND, Order_Code_Farnell=2666407, Order_Code_RS=814-5230, Part_Preference=Recommended, Part_Type=Capacitor, Provided_By=Subcon, ShowFields=YES, Status=Released
C38: library part MCD-00010, "Capacitor, MLCC, 1uF, 16V, X5R, 10%, 0603, T=0,8mm", Manufacturer=YAGEO, Manufacturer_Part_Number=CC0603KRX5R7BB105, Package=0603, Component_Country_Of_Origin=China, ComponentLink1Description=Yageo_Capacitor_X5R-series.pdf, ComponentLink1URL=http://tunmcdsvn.tun.st.com/Component_Documentation_Library/Trunk/Capacitor/YAGEO_X5R_Series, ECCN_EU=n/a, ECCN_US=n/a, ID=2470, Initial_Board_Reference=mb1274, Internal_Part_Number=MCD-00010, Order_Code_Digikey=311-1444-1-ND, Order_Code_Farnell=2370680, Order_Code_RS=2370680, Part_Preference=Recommended, Part_Type=Capacitor, Provided_By=Subcon, ShowFields=YES, Status=Released
C41: library part MCD-00595, "Capacitor, Tantalum, 4.7uF, 16V, +/-10%, 595D case A", Manufacturer=VISHAY, Manufacturer_Part_Number=595D475X9016A2T, Package="3718 (metric)", Component_Country_Of_Origin=Israel, ComponentLink1Description=VISHAY_CAPACITOR_TANTALUM_595D.pdf, ComponentLink1URL=http://tunmcdsvn.tun.st.com/Component_Documentation_Library/Trunk/Capacitor/VISHAY_595D_Series, ID=3146, Initial_Board_Reference=MB1331, Internal_Part_Number=MCD-00595, Order_Code_Digikey=595D475X9016A2T-ND, Order_Code_Farnell=1166805, Order_Code_RS=117-303, Part_Preference=Recommended, Part_Type=Capacitor, Provided_By=Subcon, Revision="July-2002: Re-released for DXP Platform.", ShowFields=YES, Status=Released
C52: library part MCD-00594, "Capacitor, Tantalum, 1uF, 35V, +/-10%, 595D case A", Manufacturer=VISHAY, Manufacturer_Part_Number=595D105X9035A2T, Package="3718 (metric)", Component_Country_Of_Origin=Israel, ComponentLink1Description=VISHAY_CAPACITOR_TANTALUM_595D.pdf, ComponentLink1URL=http://tunmcdsvn.tun.st.com/Component_Documentation_Library/Trunk/Capacitor/VISHAY_595D_Series, ID=3150, Initial_Board_Reference=MB1331, Internal_Part_Number=MCD-00594, Order_Code_Digikey=595D105X9035A2T-ND, Order_Code_Farnell=1166819, Order_Code_RS=117-404, Part_Preference=Recommended, Part_Type=Capacitor, Provided_By=Subcon, Revision="July-2002: Re-released for DXP Platform.", ShowFields=YES, Status=Released
C63 C94: library part MCD-00014, "Capacitor, MLCC, 10uF, 25V, X5R, 10%, 0805, T=0,85mm", Manufacturer=YAGEO, Manufacturer_Part_Number=CC0805KRX5R8BB106, Package=0805, Component_Country_Of_Origin=China, ComponentLink1Description=Yageo_Capacitor_X5R-series.pdf, ComponentLink1URL=http://tunmcdsvn.tun.st.com/Component_Documentation_Library/Trunk/Capacitor/YAGEO_X5R_Series, ECCN_EU=n/a, ECCN_US=n/a, Full_Alternate_Internal_Part_Number=MCD-02385, ID=2468, Initial_Board_Reference=mb1274, Internal_Part_Number=MCD-00014, Order_Code_Digikey=311-3503-1-ND, Order_Code_Farnell=N/A, Order_Code_RS=N/A, Part_Preference=Recommended, Part_Type=Capacitor, Partial_Alternate_Internal_Part_Number=MCD-03053, Provided_By=Subcon, ShowFields=YES, Status=Released
C78: library part MCD-00006, "CAP CER 0603", Manufacturer=YAGEO, Manufacturer_Part_Number=CC0402KRX7R7BB104, Package=0402, Component_Country_Of_Origin=China, ComponentLink1URL=http://tunmcdsvn.tun.st.com/Component_Documentation_Library/Trunk/Capacitor/YAGEO_X7R_Series, ID=2474, Internal_Part_Number=MCD-00006, Order_Code_Digikey=311-1338-1-ND, Order_Code_Farnell=9402047, Order_Code_RS=9402047, Part_Preference=Recommended, Part_Type=Capacitor, Partial_Alternate_Internal_Part_Number=MCD-03299, ShowFields=YES, Status=Released
C79 C80 C81 C82 C87 C89 C90 C91 C92 C93 C95 C96 C97 C98 C99 C100 C101 C102: library part CAP_SMD, "CAP_Chip"
C83 C84 C88: library part MCD-00595, "Capacitor, Tantalum, 33uF, 16V, +/-10%, 595D case A", Manufacturer=VISHAY, Manufacturer_Part_Number=595D475X9016A2T, Package="3718 (metric)", Component_Country_Of_Origin=Israel, ComponentLink1Description=VISHAY_CAPACITOR_TANTALUM_595D.pdf, ComponentLink1URL=http://tunmcdsvn.tun.st.com/Component_Documentation_Library/Trunk/Capacitor/VISHAY_595D_Series, ID=3146, Initial_Board_Reference=MB1331, Internal_Part_Number=MCD-00595, Order_Code_Digikey=595D475X9016A2T-ND, Order_Code_Farnell=1166805, Order_Code_RS=117-303, Part_Preference=Recommended, Part_Type=Capacitor, Provided_By=Subcon, Revision="July-2002: Re-released for DXP Platform.", ShowFields=YES, Status=Released
C85 C86: library part _CAP_C_2, "CAP CHIP"
D1: library part CMP-12225-000055-1, "TVS DIODE 26.5V 44V SOT323-3", Breakdown Voltage=28.5V, Capacitance=3pF, Clamping Voltage=44V, Manufacturer=STMicroelectronics, Max Junction Temp=+175°C, Package=SOT323-3L, Peak Pulse Current=3A, Peak Pulse Power=170W, Reverse Standoff Voltage=26.5V, Temperature="-55°C to +175°C", Temperature Range Low=-55°C, Automotive=Yes, Automotive Grade="Grade 0", Category=Diode, ComponentLink2Description=Datasheet, ComponentLink2URL=https://www.st.com/resource/en/datasheet/esdcan02-2bwy.pdf, Device Class L1="Circuit Protection", Device Class L2="TVS Diodes", Device Class L3=unset, Digikey Description="TVS DIODE 26.5V 44V SOT323-3", Direction=Bidirectional, Height=1.1mm, Ipc Land Pattern Name=SOT65P210X95-3, Lead Free=Yes, Manufacturer Part Number=ESDCAN02-2BWY, Mouser Description="TVS Diodes / ESD Suppressors Automotive dual-line Transil, Transient voltage suppressor (TVS) for CAN bus", Number Of Channels=2, Octopart=https://octopart.com/esdcan02-2bwy-stmicroelectronics-58631133, RoHS=TRUE, Standoff Height=0mm, Temperature Range High=+175°C
D2: library part CMP-2100-03685-1, "Schottky Barrier Rectifier, 40 V, 5 A, -55 to 150 degC, 2-Pin SMD", Manufacturer=JCET, Package Description="2-Pin Surface Mount Device, Body 4.315 x 3.62 mm", Package Reference=SMB-2, Datasheet URL=http://wiki.seeedstudio.com/images/3/3f/0310130P1.pdf, Datasheet Version=41395.0, Manufacturer URL=http://www.cj-elec.com/
DS1 DS4: library part MCD-02900, "LED, Green, 2V, 25mA, 0603, SMD", Manufacturer=EVERLIGHT, Manufacturer_Part_Number=19-213SYGC/S530-E2/5T, Package=0603, Component_Country_Of_Origin=China, ComponentLink1URL=http://tunmcdsvn.tun.st.com/Component_Documentation_Library/Trunk/Display/EVERLIGHT_19-213SYGC-S530-E2-5T, Full_Alternate_Internal_Part_Number=MCD-00320, ID=5016, Internal_Part_Number=MCD-02900, Order_Code_Digikey=1080-19-213SYGC/S530-E2/5TTR-ND, Order_Code_Farnell=N/A, Order_Code_RS=N/A, Part_Preference=Recommended, Part_Type=Display, Partial_Alternate_Internal_Part_Number=MCD-00050, ShowFields=YES, Status=Checked
DS2 DS3: library part MCD-02899, "LED, Red, VF : Min=1.75V , Max=2.35V, 25mA, 0603", Manufacturer=EVERLIGHT, Manufacturer_Part_Number=19-213/R6C-AP1Q2B/5T, Package=0603, Component_Country_Of_Origin=China, ComponentLink1URL=http://tunmcdsvn.tun.st.com/Component_Documentation_Library/Trunk/Display/EVERLIGHT_19-213-R6C-AP1Q2B-5T, Full_Alternate_Internal_Part_Number=MCD-00049, ID=5015, Internal_Part_Number=MCD-02899, Order_Code_Digikey=1080-19-213/R6C-AP1Q2B/5TTR-ND, Order_Code_Farnell=N/A, Order_Code_RS=N/A, Part_Preference=Recommended, Part_Type=Display, ShowFields=YES, Status=Checked
FB1: library part CMP-0686-00117-3, "Ferrite Bead, 0201, 33Ω @ 100MHz, 25%, 0.09Ω, 750mA", Case Code (Imperial)=0201, Case Code (Metric)=0603, Current Rating=750mA, DC Resistance (DCR)=90mR, Max Operating Temperature=125°C, Min Operating Temperature=-55°C, Package Quantity=1, Test Frequency=100MHz, Tolerance=25%, Case/Package=0201, Height=0.3mm, Impedance=33R, Lead Free="Lead Free", Length=0.6mm, Material=Steel, Max Current Rating=750mA, Max DC Current=750mA, Number of Circuits=1, Number of Lines=1, Number of Pins=2, Packaging="Tape and Reel", REACH SVHC="No SVHC", RoHS Compliant=Yes, Series=BLM03P, Termination=SMD/SMT, Width=0.3mm
FB2: library part CMP-0686-00581-3, "Chip Ferrite Bead, 0603, 600Ω @ 100MHz, 0.15Ω, 25%, 1.3A", Case Code (Imperial)=0603, Case Code (Metric)=1608, Current Rating=1.3A, DC Resistance (DCR)=150mR, Inductor Type="FERRITE BEAD", Max Operating Temperature=125°C, Min Operating Temperature=-55°C, Package Quantity=1, Test Frequency=100MHz, Tolerance=25%, Case/Package=0603, Core Material=Ferrite, DC Current=1.3A, Depth=0.8mm, Height=0.8mm, Impedance=600R, Lead Free="Lead Free", Length=1.6mm, Material=Steel, Max Current Rating=1.3A, Max DC Current=1.3A, Military Standard=Not, Number of Circuits=1, Number of Lines=1, Number of Pins=2, Packaging="Tape and Reel", Radiation Hardening=No, REACH SVHC="No SVHC", RoHS Compliant=Yes, Series=BLM18K, Termination=SMD/SMT, Weight=7.1E-05oz, Width=0.8mm
FB3 FB4: library part CMP-0686-00557-7, "Chip Ferrite Bead, 0603, 120Ω @ 100MHz, 0.05Ω, 25%, 2A", Case Code (Imperial)=0603, Case Code (Metric)=1608, Current Rating=2A, DC Resistance (DCR)=50mR, Frequency=100MHz, Max Operating Temperature=125°C, Min Operating Temperature=-55°C, Package Quantity=1, Tolerance=25%, Case/Package=0603, Core Material=Ferrite, DC Current=2A, Depth=0.8mm, Height=0.8mm, Impedance=120R, Lead Free="Lead Free", Length=1.6mm, Material=Steel, Max Current Rating=2A, Max DC Current=2A, Number of Circuits=1, Number of Lines=1, Number of Pins=2, Packaging="Tape and Reel", Radiation Hardening=No, REACH SVHC="No SVHC", RoHS Compliant=Yes, Shielding=Unshielded, Termination=SMD/SMT, Test Frequency=100MHz, Width=0.8mm
J1: library part CMP-02766-000084-1, "CONN HEADER VERT 2POS 2.54MM", Current Rating=6.3A, Manufacturer=Samtec, Temperature="-55°C to +125°C", Temperature Range High=+125°C, Temperature Range Low=-55°C, Voltage Rating=550V, Automotive=No, Category=Conn, ComponentLink2Description=Datasheet, ComponentLink2URL=http://suddendocs.samtec.com/catalog_english/tsw_th.pdf, Conn Gender=Male, Conn Orientation=Straight, Contact Material=Gold,Nickel, Device Class L1=Connectors, Device Class L2="Headers and Wire Housings", Device Class L3=unset, Digikey Description="CONN HEADER VERT 2POS 2.54MM", Footprint Url=http://suddendocs.samtec.com/prints/tsw-xxx-xx-x-x-xx-xxx-footprint.pdf, Height=8.71mm, Lead Free=Yes, Manufacturer Part Number=TSW-102-07-G-S, Mouser Description="Conn Unshrouded Header HDR 2 POS 2.54mm Solder ST Thru-Hole Automotive Bulk", Number Of Contacts=2, Number Of Rows=1, Octopart=https://octopart.com/tsw-102-07-g-s-samtec-272197, Package=TSW-102-07-G-S, Pitch=2.54mm, RoHS=TRUE
J2: library part CMP-00257-07614144-1, "47590-0001 USB Connector, 5 Contact(s), Female, Right Angle, Surface Mount Terminal, Locking, Receptacle", Color=Black, Contact Resistance=40mΩ, Current Rating=1.8A, Manufacturer Lifecycle Status=ACTIVE, Max Operating Temperature=85°C, Max Voltage Rating (AC)=100V, Min Operating Temperature=-30°C, Voltage Rating=30V, Connector Type="Receptacle, USB", Contact Material=Copper, Contact Plating=Gold, Country of Origin=US, Depth=5.8mm, Gender=Female, Height=3.1mm, Housing Material=Polymer, Length=8.65mm, Lifecycle Status=Production, Mount="Surface Mount", NexarPartId=7614144, Number of Circuits=5, Number Of Contacts=5, Number of Pins=5, Number of Ports=1, Number Of Rows=1, Number of Terminals=5, Orientation="Right Angle", Packaging="Tape & Reel", Pitch=650µm, Plating=Gold, Radiation Hardening=No, REACH SVHC=Unknown, RoHS=Compliant, Schedule B="8536695050, 8536695050", Termination=Solder, USB Standard="USB 2.0", Voltage Rating (AC)=30V, Weight=9.071847g, Width=6.35mm
J3 J4: "Connector Header Surface Mount, Right Angle 9 position 0.059\" (1.50mm)"
J5: "1.50mm Pitch, Pico-Lock PCB Header, Single Row, Right-Angle, Surface Mount, Gold (Au) Plating, Positive Lock, 5 Circuits, Tape and Reel", Manufacturer_Name="Molex Connector Corporation", Copyright="Copyright (C) 2025 Ultra Librarian. All rights reserved.", Manufacturer_Part_Number=5040500591, RefDes=RefDes, Type=Type
J6: "pads for STLink V3 minie"
J8: "WR-PHD Pin Header, THT, Vertical, pitch 2.54mm, 2 Row, 10P", Contact Resistance=20mOhm, Manufacturer="Wurth Elektronik", Operating Temperature Max=105°C, Operating Temperature Min=-40°C, Rated Current=3A, Withstanding Voltage=500V, Working Voltage=250V, Category="Board-to-Board Connectors", ComponentLink1Description="Website Link", ComponentLink1URL=https://www.we-online.com/redexpert/article/61301021121?ad, ComponentLink2Description="Datasheet Link", ComponentLink2URL=https://www.we-online.com/redexpert/spec/61301021121?ad, Gender="Pin Header", Manufacturer Part Number=61301021121, Match Code=WR-PHD, Mount="Through Hole", Number of Pins=10, Number Of Rows=2, Orientation=Vertical, Packaging=Bag, Pitch=2.54mm
J9 J10: "PC / 104 Connectors Elevated Socket Strip"
J11: "1.50mm Pitch, Pico-Lock PCB Header, Single Row, Right-Angle, Surface Mount, Gold (Au) Plating, Positive Lock, 9 Circuits, Tape and Reel", Manufacturer_Name="Molex Connector Corporation", Copyright="Copyright (C) 2025 Ultra Librarian. All rights reserved.", Manufacturer_Part_Number=5040500991, RefDes=RefDes, Type=Type
L1: library part CMP-08253-000351-1, "Shielded Multilayer Inductor 2.2uH ±20% 500mA 234mΩ AEC-Q200 SMD 0603", Case Code (Imperial)=0603, Case Code (Metric)=1608, Current Rating=500mA, DC Resistance (DCR)=234mR, Max Operating Temperature=125°C, Min Operating Temperature=-55°C, Package Quantity=4000, Ratings=AEC-Q200, Saturation Current=110mA, Test Frequency=2MHz, Tolerance=20%, Case/Package=0603, Core Material=Ferrite, Height=0.8mm, Height - Seated (Max)=0.037inch, Inductance=2.2uH, Length=0.063inch, Max DC Current=500mA, Mount="Surface Mount", Packaging="Tape and Reel", RoHS Compliant=Yes, Shielding=Shielded, Termination=SMD/SMT, Weight=0.000141oz, Width=0.031inch
L2: "15uH/3A"
Q2: library part CMP-1048-00662-1, "High Voltage Transistor, NPN Silicon, 3-Pin SOT-23, Pb-Free, Tape and Reel", Manufacturer="On Semiconductor", ComponentLink1Description="Manufacturer URL", ComponentLink1URL=http://www.onsemi.com/, ComponentLink2Description=Datasheet, ComponentLink2URL=http://www.onsemi.cn/pub_link/Collateral/MMBTA42LT1-D.PDF, ComponentLink3Description="Package Specification", ComponentLink3URL=http://www.onsemi.cn/pub_link/Collateral/318-08.PDF, DatasheetVersion="Rev. 12", fT Min (MHz)=50, IC Continuous (A)=0.5, Mounting Technology="Surface Mount", PackageDescription="3-Pin Small Outline Transistor, Body 2.92 x 1.3 mm, Pitch 0.95 mm", PackageReference=SOT-23-3-318-08, PackageVersion="Rev. AP, 11/2009", Packing="Tape and Reel", PartNumber=MMBTA42LT1G, Polarity=NPN, RoHS=TRUE